# EAGLE board PEBoard (EAGLE 7.5.0)
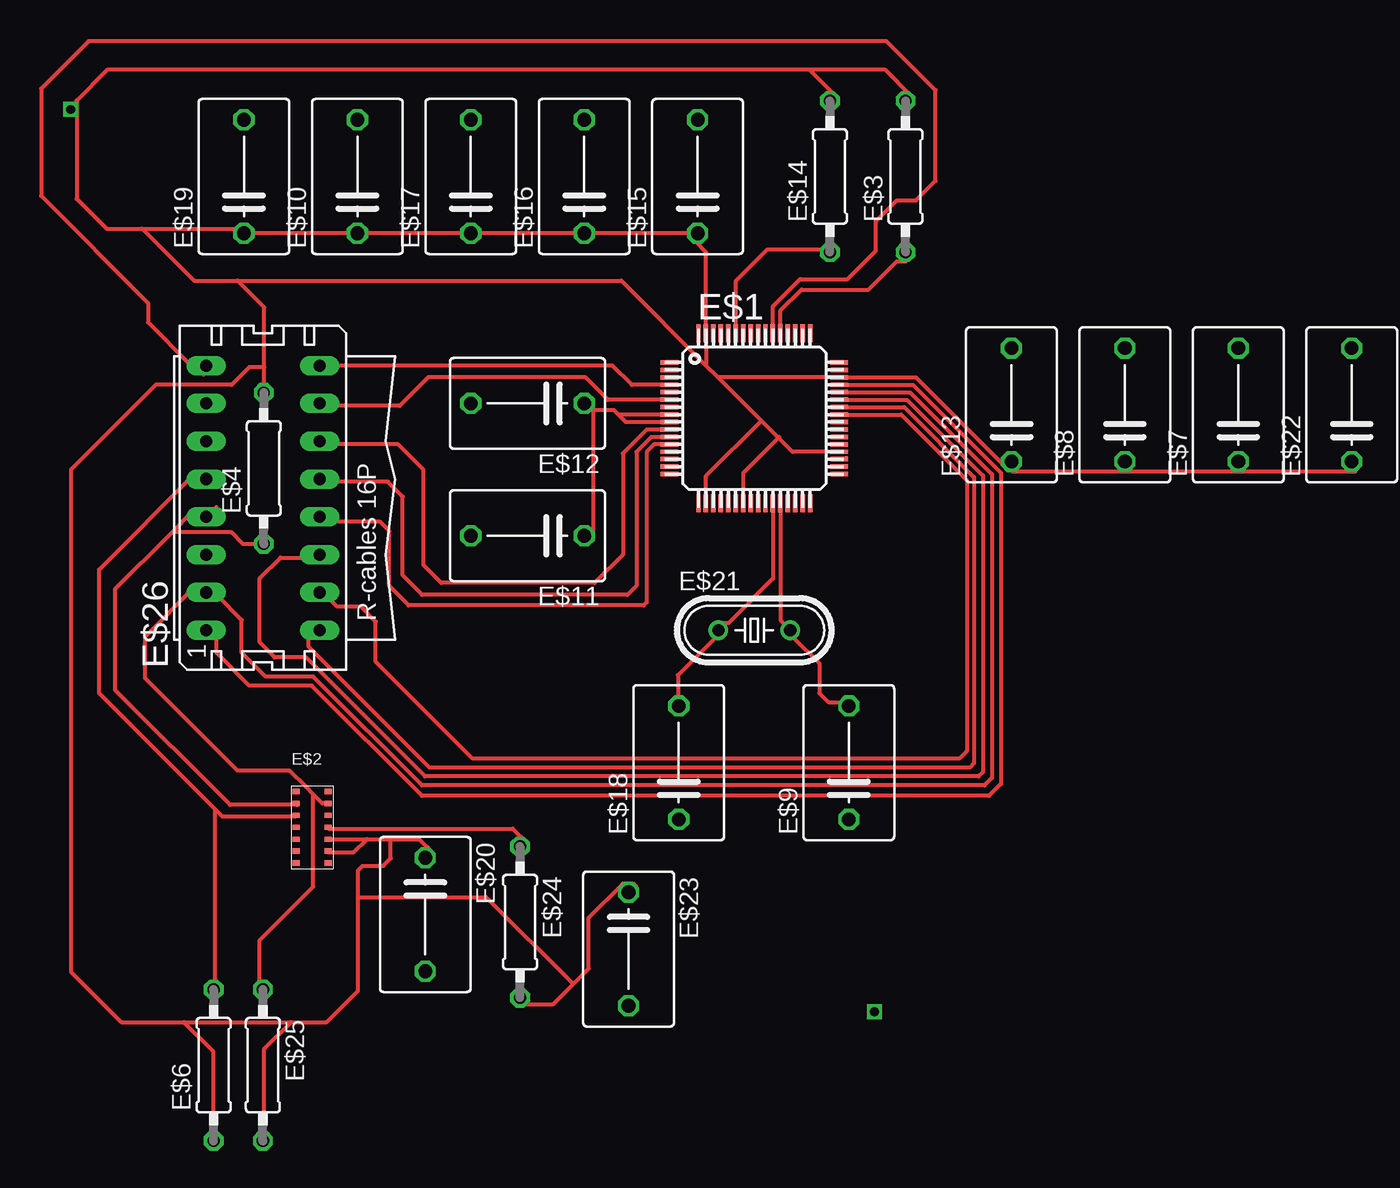
[diagram p0: board, top side]
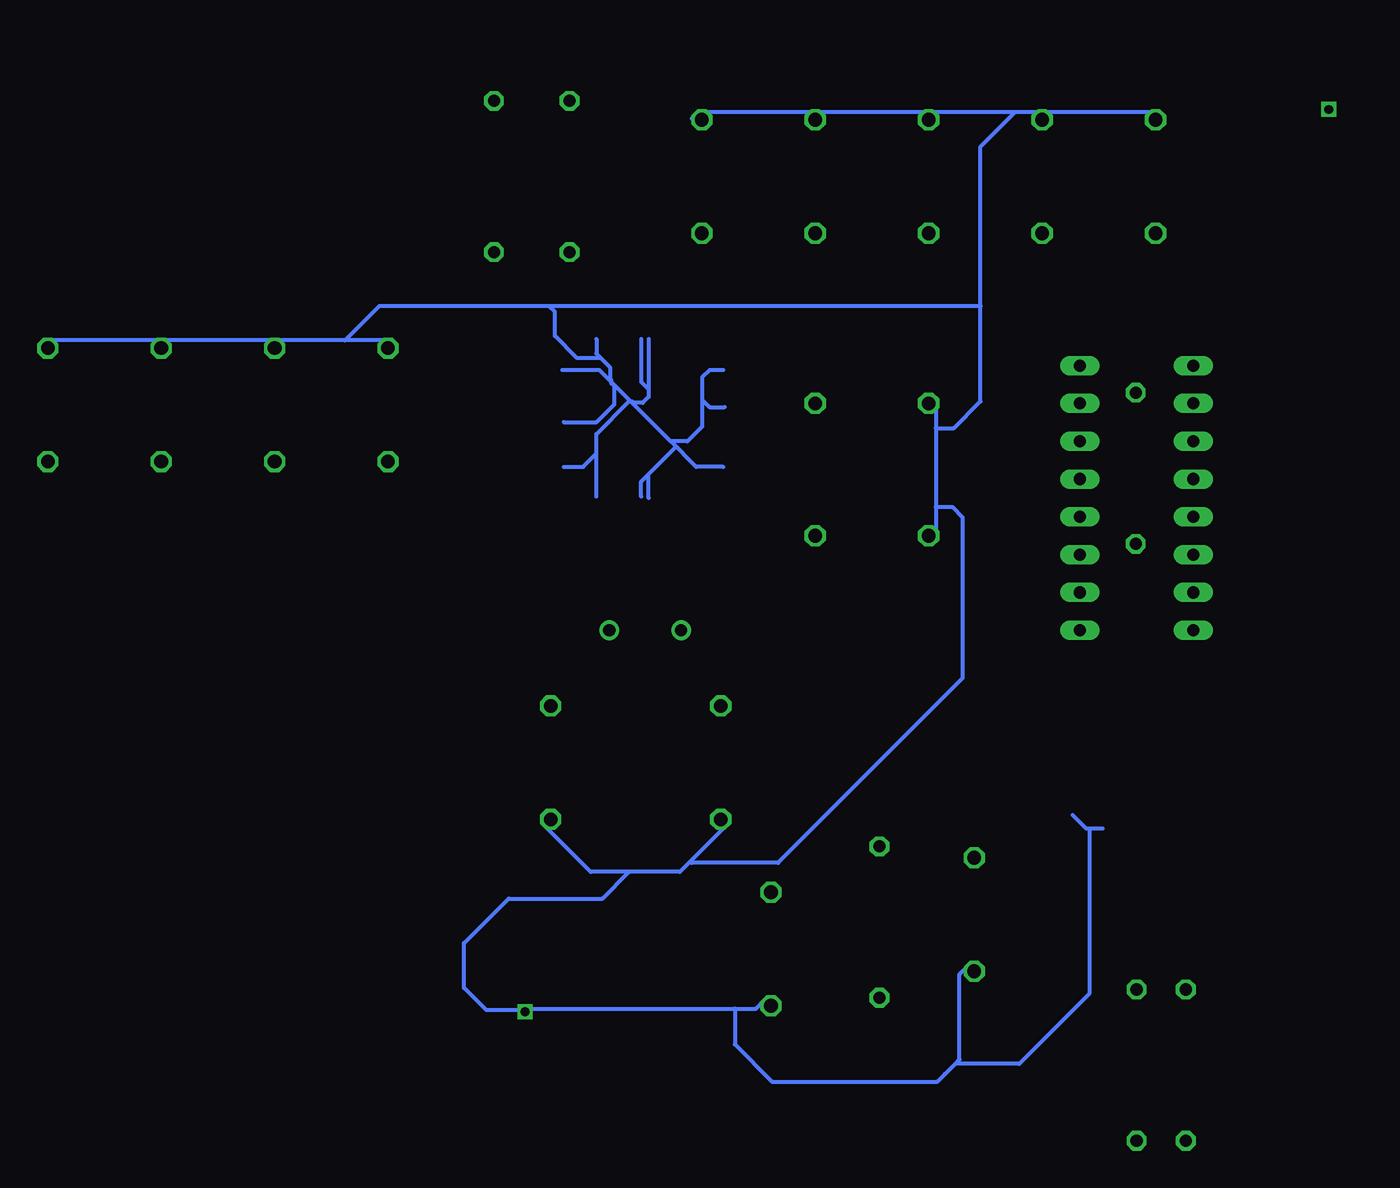
[diagram p1: board, bottom side, seen from below]

No outline drawn. Coordinates in mm, seen from the top.
Copper layers (1*16): Top 0.035mm / dielectric 1.5mm / Bottom 0.035mm
Design rules "default": minimum track width 10mil, minimum drill 24mil, track to track 8mil, track to pad 8mil, pad to pad 8mil, via to via 8mil, smd to smd 8mil, copper to edge 40mil, drill to drill 8mil, minimum pad ring 10mil, minimum via ring 8mil, stop-mask expansion 4mil, vias tented up to drill 0mil, thermal gap 10mil

## Footprints (pad centres in the part's own frame; a part is rotated, then mirrored left to right if it is on the bottom)
ADAS1000-4BSTZDP = smd 1.2 x 0.3: 1 -5.7,2.75; 2 -5.7,2.25; 3 -5.7,1.75; 4 -5.7,1.25; 5 -5.7,0.75; 6 -5.7,0.25; 7 -5.7,-0.25; 8 -5.7,-0.75; 9 -5.7,-1.25; 10 -5.7,-1.75; 11 -5.7,-2.25; 12 -5.7,-2.75; 13 -5.7,-3.25; 14 -5.7,-3.75; 15 -5.7,-4.25; 16 -5.7,-4.75; 33 5.7,-4.75; 34 5.7,-4.25; 35 5.7,-3.75; 36 5.7,-3.25; 37 5.7,-2.75; 38 5.7,-2.25; 39 5.7,-1.75; 40 5.7,-1.25; 41 5.7,-0.75; 42 5.7,-0.25; 43 5.7,0.25; 44 5.7,0.75; 45 5.7,1.25; 46 5.7,1.75; 47 5.7,2.25; 48 5.7,2.75 | smd 0.3 x 1.2: 17 -3.75,-6.7; 18 -3.25,-6.7; 19 -2.75,-6.7; 20 -2.25,-6.7; 21 -1.75,-6.7; 22 -1.25,-6.7; 23 -0.75,-6.7; 24 -0.25,-6.7; 25 0.25,-6.7; 26 0.75,-6.7; 27 1.25,-6.7; 28 1.75,-6.7; 29 2.25,-6.7; 30 2.75,-6.7; 31 3.25,-6.7; 32 3.75,-6.7; 49 3.75,4.7; 50 3.25,4.7; 51 2.75,4.7; 52 2.25,4.7; 53 1.75,4.7; 54 1.25,4.7; 55 0.75,4.7; 56 0.25,4.7; 57 -0.25,4.7; 58 -0.75,4.7; 59 -1.25,4.7; 60 -1.75,4.7; 61 -2.25,4.7; 62 -2.75,4.7; 63 -3.25,4.7; 64 -3.75,4.7
MAX30100DP = smd 0.5 x 0.35: 1 -1.075,2.4; 2 -1.075,1.6; 3 -1.075,0.8; 4 -1.075,0; 5 -1.075,-0.8; 6 -1.075,-1.6; 7 -1.075,-2.4; 8 1.075,-2.4; 9 1.075,-1.6; 10 1.075,-0.8; 11 1.075,0; 12 1.075,0.8; 13 1.075,1.6; 14 1.075,2.4
0207/10 = drill 0.813 octagon: 1 -5.08,0; 2 5.08,0
C075-063X106 = drill 0.914 octagon: 1 -3.81,0; 2 3.81,0
CRYSTAL8.192MHZ = drill 0.813: 1 -2.413,0; 2 2.413,0
16P = drill 0.813 long: 1 -8.89,3.81; 2 -8.89,-3.81; 3 -6.35,3.81; 4 -6.35,-3.81; 5 -3.81,3.81; 6 -3.81,-3.81; 7 -1.27,3.81; 8 -1.27,-3.81; 9 1.27,3.81; 10 1.27,-3.81; 11 3.81,3.81; 12 3.81,-3.81; 13 6.35,3.81; 14 6.35,-3.81; 15 8.89,3.81; 16 8.89,-3.81

## Placement (x,y rotation side)
E$1  [ADAS1000-4BSTZDP]  36.83,60.96 0 top
E$2  [MAX30100DP]  7.12,32.49 0 top
E$3  [0207/10]  46.99,76.2 90 top
E$4  [0207/10]  3.87,56.6 90 top
E$6  [0207/10]  0.5,16.51 90 top
E$7  [C075-063X106]  69.35,60.86 90 top
E$8  [C075-063X106]  61.73,60.86 90 top
E$9  [C075-063X106]  43.18,36.83 90 top
E$10  [C075-063X106]  10.16,76.2 90 top
E$11  [C075-063X106]  21.59,52.07 180 top
E$12  [C075-063X106]  21.59,60.96 180 top
E$13  [C075-063X106]  54.11,60.86 90 top
E$14  [0207/10]  41.91,76.2 90 top
E$15  [C075-063X106]  33.02,76.2 90 top
E$16  [C075-063X106]  25.4,76.2 90 top
E$17  [C075-063X106]  17.78,76.2 90 top
E$18  [C075-063X106]  31.75,36.83 90 top
E$19  [C075-063X106]  2.54,76.2 90 top
E$20  [C075-063X106]  14.72,26.63 270 top
E$21  [CRYSTAL8.192MHZ]  36.83,45.72 0 top
E$22  [C075-063X106]  76.97,60.86 90 top
E$23  [C075-063X106]  28.38,24.31 270 top
E$24  [0207/10]  21.09,26.12 270 top
E$25  [0207/10]  3.81,16.51 270 top
E$26  [16P]  3.81,54.61 90 top

## Library data of the parts
E$1 = ADAS1000-4BSTZDP
E$2 = max30100DP
E$3 E$4 E$6 E$14 E$24 E$25 = resistor
E$7-E$13 E$15-E$20 E$22 E$23 = adafruit
E$21 = Crystal 8.192MHz
E$26 = con-dil

## Tracks (layer width: path | path; a pad name or v marks a point on that pad's centre or on a via)
S$1
  Top 0.254: 38.6,53.8 38.6,46.4 39.2,45.8
S$2
  Top 0.254: 38.1,53.8 38.1,49.2 35.1,46.2 34.4,46.2
S$3
  Top 0.254: 34.2,45.2 31.7,42.7 31.7,41.3
S$4
  Top 0.254: 39.5,45.2 41.2,43.5 41.2,41.5 41.8,40.9 42.7,40.9
S$6
  Top 0.254: 33.6,66.1 33.6,71.1 32.9,71.8
S$7
  Top 0.254: 32.4,72.4 26,72.4
S$8
  Top 0.254: 24.8,72.4 18.4,72.4
S$9
  Top 0.254: 17.2,72.4 10.8,72.4
S$10
  Top 0.254: 9.6,72.4 3.1,72.4
S$12
  Bottom 0.254: 31.6,63.2 32.5,63.2 33,62.7 33,61.2 | 33,61.2 32.5,60.7 31.5,60.7 | 33,61.2 33,59.4 34,58.4 35.1,58.4 | 31.6,56.7 33.4,56.7 35.1,58.4 | 42.4,63.2 39.9,63.2 35.2,58.5 35.1,58.4
S$14
  Bottom 0.254: 36.6,54.6 36.6,56.2 | 36.6,56.2 35.5,57.3 34.8,58 | 37.1,54.7 37.1,55.7 36.6,56.2
S$15
  Top 0.254: 35.6,66.1 35.6,69.2 37.7,71.3 41.4,71.3
S$16
  Top 0.254: 38.6,66.1 38.6,67.2 40,68.6 44.5,68.6 46.4,70.5 47,70.5
S$17
  Top 0.254: 54.2,56.4 77.2,56.4
S$18
  Bottom 0.254: 40.1,54.7 40.1,57.6 | 40.1,57.6 40.1,58.9 37.9,61.1 | 42.3,56.7 41,56.7 40.1,57.6
S$19
  Top 0.254: 36.1,54.7 36.1,56.3 38.5,58.7
S$20
  Top 0.254: 26,61 26,51.8
S$21
  Bottom 0.254: 42.3,59.7 40.1,59.7 38.9,60.9 38.9,62.1 39.1,62.3
S$22
  Top 0.254: 31.1,59.7 28.2,59.7 27.7,60.2 | 27.7,60.2 27.4,60.5 25.4,60.5 | 30.7,60.2 27.7,60.2
S$23
  Top 0.254: 30.7,62.2 28.6,62.2 27.3,63.5 8.6,63.5
S$24
  Top 0.254: 30.7,61.2 27,61.2 25.5,62.7 14.9,62.7 13,60.8 8.4,60.8
S$25
  Top 0.254: 30.6,58.2 30.1,58.2 29.6,57.7 29.6,47.6 29.4,47.4 13.6,47.4 12.3,48.7 12.3,52.4 11.7,53 8.5,53 8.4,53.1
S$26
  Top 0.254: 30.7,58.7 29.9,58.7 28.9,57.7 28.9,48.7 28.3,48.1 14.5,48.1 13.2,49.4 13.2,54.7 12.2,55.7 8.5,55.7
S$27
  Top 0.254: 30.7,59.2 29.6,59.2 28,57.6 28,50.8 26.1,48.9 15.8,48.9 14.6,50.1 14.6,56.5 12.9,58.2 8.4,58.2
S$28
  Top 0.254: -4.3,72.7 2.3,72.7 2.4,72.6 | 40.5,83.4 -6.6,83.4 -8.7,81.3 -8.7,74.7 -6.7,72.7 -4.3,72.7 | 40.5,83.4 42.3,81.6 | 40.5,83.4 45.6,83.4 47.3,81.7 | -4.3,72.7 -0.8,69.2 2.1,69.2 | 2.1,69.2 27.9,69.2 33.6,63.5 | 33.6,65 33.6,63.5 | 42.5,62.7 34.4,62.7 | 34.4,62.7 33.6,63.5 | 42.3,57.7 39.4,57.7 34.4,62.7 | 3.9,62.1 3.9,63.4 | 3.9,63.4 3.9,67.4 2.1,69.2 | 3.9,63.4 2.9,63.4 1.7,62.2 -3.4,62.2 -9.1,56.5 -9.1,22.8 -5.7,19.4 -1.5,19.4 | -1.5,19.4 5.7,19.4 | 5.7,19.4 8.1,19.4 10.2,21.5 10.2,27.8 | 10.2,27.8 10.2,29.6 10.5,29.9 11.9,29.9 12.4,30.4 12.4,31.6 | 10.2,27.8 18.8,27.8 24.6,22 | 0.5,11.9 0.5,17.4 -1.5,19.4 | 3.9,11.9 3.9,17.6 5.7,19.4
S$29
  Top 0.254: 42.9,57.2 43,57.3
S$30
  Top 0.254: 42.6,62.7 47.7,62.7 53.9,56.5
S$31
  Top 0.254: 37.3,59.8 33.6,56.1 33.6,54.7
S$32
  Top 0.254: 42.9,62.2 47.5,62.2 53.4,56.3 53.4,35.4 52.6,34.6 14.5,34.6 7.1,42 2.9,42 0.7,44.2 0.7,45.9
S$33
  Top 0.254: 42.9,61.7 47.3,61.7 52.8,56.2 52.8,35.8 52.3,35.3 14.5,35.3 7.2,42.6 4,42.6 2.4,44.2 2.4,46.4 0.8,48
S$34
  Top 0.254: 43,61.2 47.1,61.2 52.2,56.1 52.2,36.2 51.9,35.9 14.7,35.9 6.7,43.9 4.6,43.9 3.6,44.9 3.6,49.2 5,50.6 6.6,50.6 6.8,50.8
S$35
  Top 0.254: 43,60.7 46.9,60.7 51.6,56 51.6,36.8 51.3,36.5 15,36.5 6.9,44.6 6.9,45.9 7.2,46.2
S$36
  Top 0.254: 43,60.2 46.7,60.2 51.1,55.8 51.1,37.6 50.6,37.1 17.9,37.1 11.4,43.6 11.4,46.3 10.4,47.3 8.8,47.3 8.3,47.8
S$37
  Top 0.254: 38.1,66.1 38.1,67.5 39.9,69.3 43.1,69.3 45,71.2 45,73.2 46.4,74.6 47.7,74.6 49,75.9 49,82 45.7,85.3 -7.9,85.3 -11.1,82.1 -11.1,74.9 -3.9,67.7 -3.9,66.4 -1.1,63.6 -1.1,63.5 -0.7,63.1 -0.4,63.1 -0.2,62.9
S$38
  Top 0.254: 8.2,32.4 20.6,32.4 21.5,31.5
S$39
  Top 0.254: 6,33.2 1.1,33.2 0.6,33.7 | -0.8,56.2 -7.2,49.8 -7.2,41.5 -0.2,34.5 0.6,33.7 | 0.6,22 0.6,33.7
S$40
  Top 0.254: 21.5,20.6 23.3,20.6 25.7,23 25.7,26.4 28,28.7 28.7,28.7 28.9,28.5
S$41
  Top 0.254: 3.3,51.5 2.5,51.5 1.7,52.3 -2.3,52.3 | 6.1,34 1.6,34 -6.1,41.7 -6.1,48.5 -2.5,52.1 -2.3,52.3 | -2.3,52.3 -0.9,53.7 0.4,53.7 0.7,54
S$42
  Top 0.254: 3.6,22.1 3.6,24.9 7.2,28.5 7.2,34.7 | 8.3,34.1 7.8,34.1 7.2,34.7 | -0.8,48.6 -4.1,45.3 -4.1,42.5 2.1,36.3 5.6,36.3 6.7,35.2 7.2,34.7
S$43
  Top 0.254: 8.2,31.7 10.8,31.7 | 10.8,31.7 14.3,31.7 15.2,30.8 | 8.2,30.8 9.9,30.8 10.8,31.7
S$44  (via drill 0.6)
  other vias: 44.9,20.1
S$45
  Bottom 0.254: 40.1,65.3 40.1,64.3 39.8,64 | 39.8,64 39.2,63.4 39.2,62.6 39.1,62.5 | 39.8,64 41.4,64 42.9,65.5 42.9,67.1 43.3,67.5 | 17.3,61 17.3,59.3 | 17.3,59.3 17.3,54 | 17.3,54 17.3,52 17.4,51.9 | 17.3,54 16.2,54 15.5,53.3 15.5,42.5 27.9,30.1 33.7,30.1 33.8,30.2 | 45.3,20.2 47.5,20.2 49,21.7 49,24.7 46,27.7 39.7,27.7 37.9,29.5 | 31.3,32.7 33.8,30.2 | 33.8,30.2 34.5,29.5 37.9,29.5 | 37.9,29.5 40.5,29.5 43.5,32.5 | 17.3,59.3 16.1,59.3 14.3,61.1 14.3,67.5 | 2.6,80.5 12,80.5 | 12,80.5 33.3,80.5 33.7,80.1 | 14.3,67.5 14.3,78.2 12,80.5 | 54.1,65.2 57,65.2 | 57,65.2 77.2,65.2 77.4,65 | 14.3,67.5 43.3,67.5 | 43.3,67.5 54.7,67.5 57,65.2
S$46
  Bottom 0.254: 6.1,32.4 7,32.4 | 7,32.4 7.2,32.4 8.1,33.3 | 7,32.4 7,21.3 11.7,16.6 16,16.6 | 44.7,20.3 30.8,20.3 | 30.8,20.3 29.4,20.3 28.7,21 | 30.8,20.3 30.8,17.9 28.3,15.4 17.2,15.4 16.7,15.9 16,16.6 | 16,16.6 15.7,16.9 15.7,22.6 15,23.3
S$48
  Bottom 0.254: 37.1,65.3 37.1,62.4 36.6,61.9 | 36.6,65.3 36.6,61.9 | 36.6,61.9 36.6,61.4 37,61 37.6,61 37.7,61.1
VCC  (via drill 0.6)
  other vias: -9.1,80.7